# Altium PCB OLD_IDEA.PcbDoc
Units mil, origin at the board's own origin, x right, y up, seen from the top; angles counter-clockwise.
Board outline 6000 x 4000 mil, 2 copper layers (Top Layer, Bottom Layer); 67 components, 54 nets, 303 pads, 0 vias.
Unrouted connection lines stored in the file: 210.
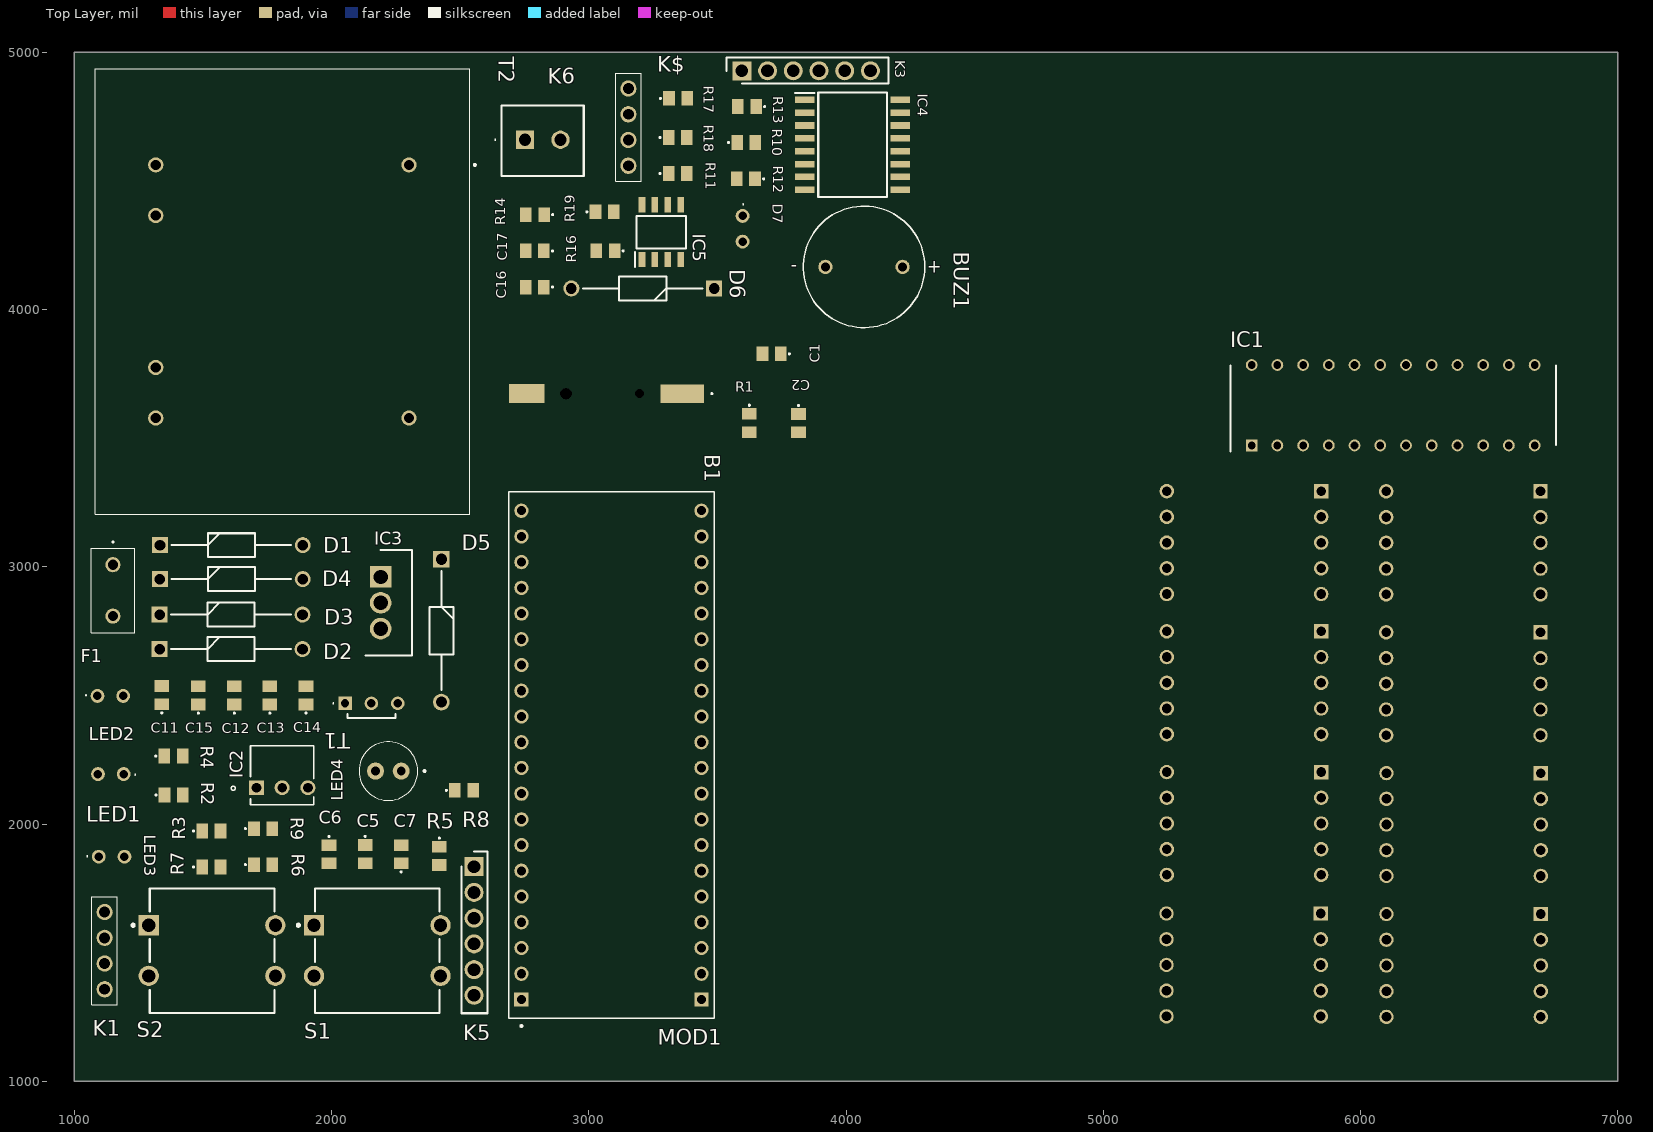
[diagram p0: Top Layer view]
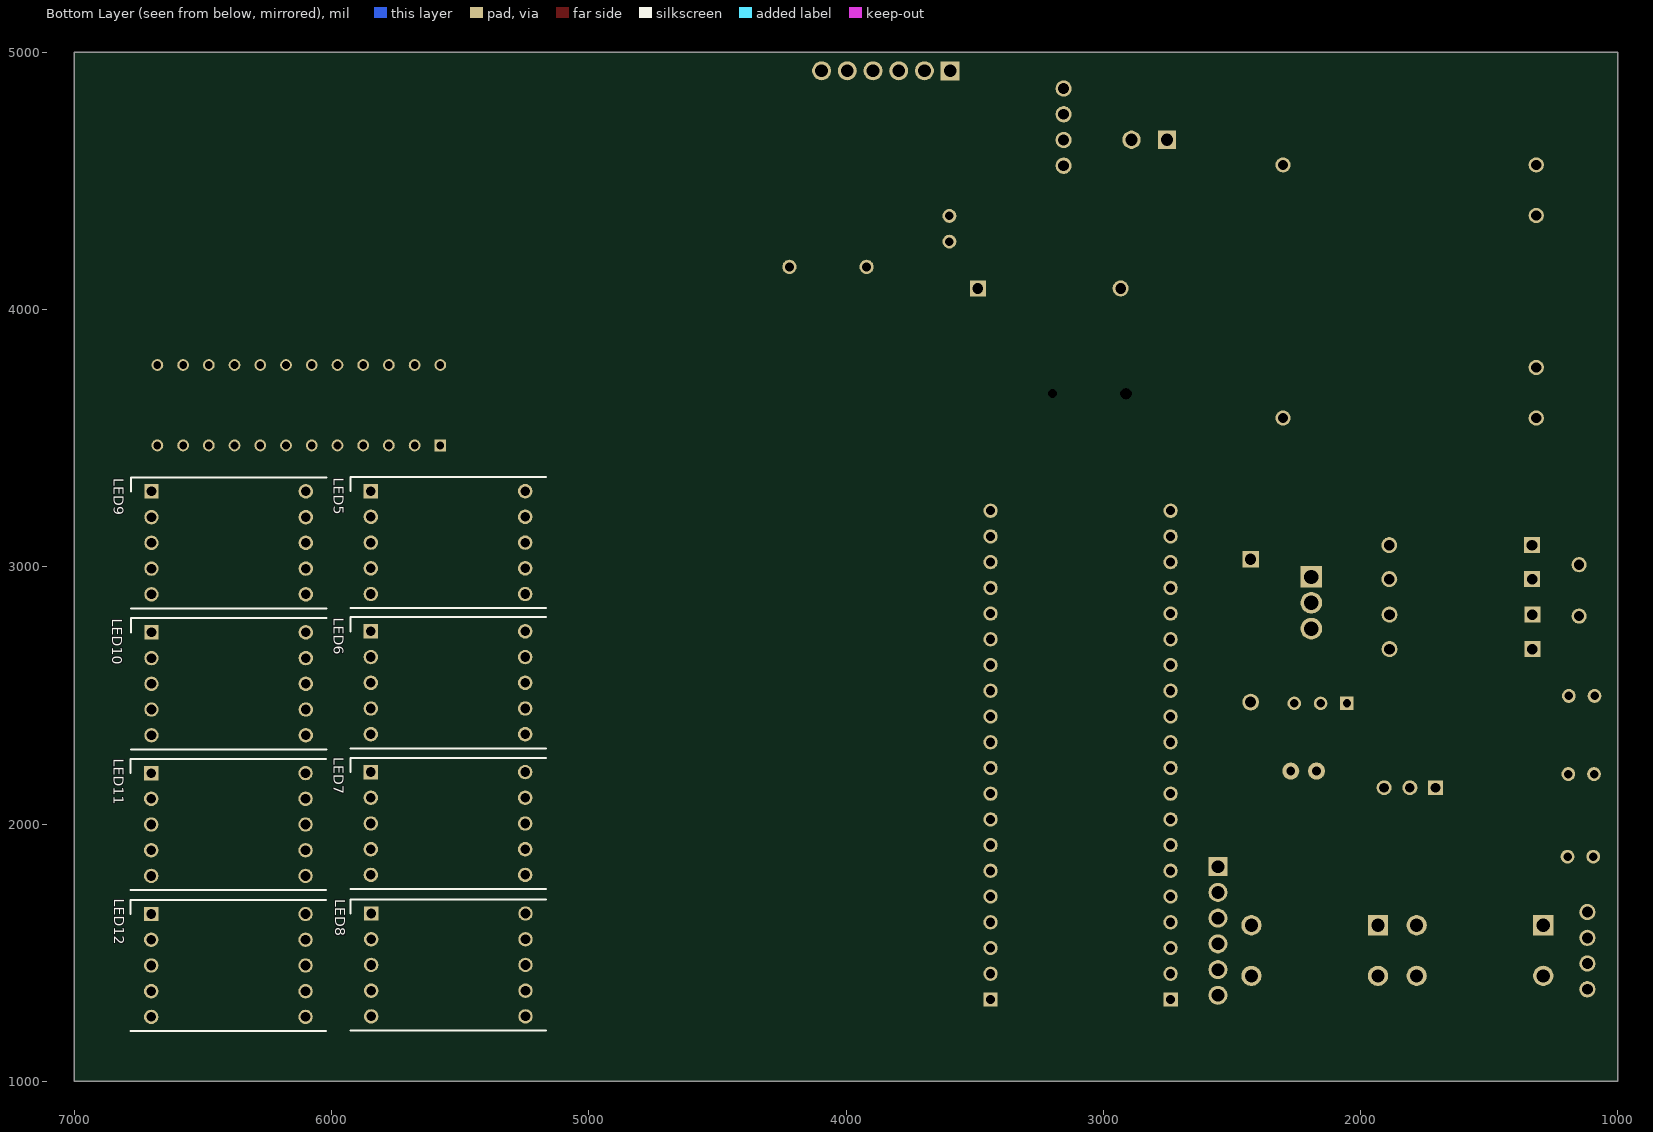
[diagram p1: Bottom Layer view, seen from below]

## Layer stack, top to bottom
Top Solder: solder mask 0.4, Solder Resist, Dk 3.5
Top Layer: signal copper 1.4
Dielectric 1: dielectric 12.6, FR-4, Dk 4.8
Bottom Layer: signal copper 1.4
Bottom Solder: solder mask 0.4, Solder Resist, Dk 3.5

## Board outline
1000,1000 7000,1000 7000,5000 1000,5000

## Design rules (kind name [scope] priority, off if disabled: settings)
Clearance [All] p1: gap=10 ignorepadtopadclearanceinfootprint=FALSE
PolygonConnect [All] p1: connectstyle=Relief reliefconductorwidth=10 reliefentries=4 polygonreliefangle="90 Angle" airgapwidth=10
RoutingVias [All] p1: holewidth=28 width=50 viastyle="Through Hole" minholewidth=28 minwidth=50 maxholewidth=28 maxwidth=50
SolderMaskExpansion [All] p1: expansion=4 istentingtop=FALSE
Width [All] p1: maxlimit=50 minlimit=10 preferedwidth=25 minimp=50.000000 maximp=50.000000 favimp=50.000000
30 further rules are at their usual default settings.

## Classes and differential pairs
component class RTC_unit: B1 C16 C17 D6 D7 IC4 IC5 K3 K$ R10 R11 R12 R13 R14 R16 R17 R18 R19
component class Processing_Unit: BUZ1 C5 C6 C7 IC2 K1 K5 LED1 LED2 LED3 LED4 MOD1 R2 R3 R4 R5 R6 R7 R8 R9 S1 S2 T1
component class Power_Unit: C11 C12 C13 C14 C15 D1 D2 D3 D4 D5 F1 IC3 K6 T2
component class Display_Unit: C1 C2 IC1 LED5 LED6 LED7 LED8 LED9 LED10 LED11 LED12 R1

## Components (designator, comment, footprint, x,y, rotation, side; value= is the part's Value field where it differs from the comment)
B1 "CR1220" CR1220HSMD 3059,3673 r180 top
BUZ1 "CEM-1212S" CUI_CEM-1212S 4070,4165.85 r180 top
C1 "100uF | 16V" C0805 3711,3828 r180 top
C2 "100nF | 16V" C0805 3815,3558.43 r270 top
C5 "47uF | 16V" C0805 2131,1883 r270 top
C6 "100nF" C0805 1990,1882.57 r270 top
C7 "1uF | 16V" C0805 2270.93,1882.57 r90 top
C11 "470uF" C0805 1340,2501 r90 top
C12 "0.1uF" C0805 1622,2500 r90 top
C13 "0.1uF" C0805 1760,2500 r90 top
C14 "100nF" C0805 1901,2500 r90 top
C15 "220uF | 16v" C0805 1482,2500 r90 top
C16 "0.1uF" C0805 2790,4087.07 r180 top
C17 "1uF" C0805 2790,4228 r180 top
D1 "1N4001" DIOAD1405W86L465D235 1333,3084.06 r0 top
D2 "1N4001" DIOAD1405W86L465D235 1332,2680 r0 top
D3 "1N4001" DIOAD1405W86L465D235 1332,2814 r0 top
D4 "1N4001" DIOAD1405W86L465D235 1332.88,2952 r0 top
D5 "1N5817" 1n5817_footprint 2427,3029.12 r270 top
D6 "1N4148,133" DIOAD1405W86L465D235 3487.49,4082 r180 top
D7 "TLHO4200" TLHO4200 3598,4314 r270 top
F1 "MCMSF_1A_250V" MCMSF1A250V 1150,3008 r270 top
IC1 "MAX7219CNG" DIP794W56P254L3054H457Q24N 6127,3628 r90 top
IC2 "TSOP34338" TO_TSOP31236 1908,2239 r0 top
IC3 "L78M05CP" TO255P460X1020X2030-3P 2191,2960.39 r270 top
IC4 "DS3231SN#" SOIC127P1032X265-16N 4026,4640.43 r0 top
IC5 "AT24C32D-SSHM-B" SOIC127P600X175-8N 3282,4301.16 r90 top
K1 "2212S-04SG-85" 2212S04SG85 1118,1357.48 r90 top
K3 "2212S-06SG-85" RHDR6W74P0X254_1X6_1574X250X850P 3595,4928 r0 top
K5 "2212S-06SG-85" RHDR6W74P0X254_1X6_1574X250X850P 2554,1834 r270 top
K6 "OSTTE020104" OSTTE020104 2752.2,4660 r0 top
K$ "2212S-04SG-85" 2212S04SG85 3154,4559 r90 top
LED1 "TLHO4200" TLHO4200 1142,2194 r180 top
LED2 "TLHO4200" TLHO4200 1140,2498 r0 top
LED3 "TLHO4200" TLHO4200 1145,1873 r0 top
LED4 "TSAL6400" TSAL6400 2271,2205.84 r180 top
LED5 "SC56-11EWA" DIPS1524W75P254L1270H825Q10N 5847,3294 r180 bottom
LED6 "SC56-11EWA" DIPS1524W75P254L1270H825Q10N 5847,2749 r180 bottom
LED7 "SC56-11EWA" DIPS1524W75P254L1270H825Q10N 5847,2202 r180 bottom
LED8 "SC56-11EWA" DIPS1524W75P254L1270H825Q10N 5846,1652 r180 bottom
LED9 "SC56-11EWA" DIPS1524W75P254L1270H825Q10N 6700,3293 r180 bottom
LED10 "SC56-11EWA" DIPS1524W75P254L1270H825Q10N 6700,2745 r180 bottom
LED11 "SC56-11EWA" DIPS1524W75P254L1270H825Q10N 6701,2198 r180 bottom
LED12 "SC56-11EWA" DIPS1524W75P254L1270H825Q10N 6701,1650 r180 bottom
MOD1 "ESP32-PICO-KIT-V4.1" XCVR_ESP32-PICO-KIT-V4.1 3088,2268 r90 top
R1 "47K" C0805 3624,3559 r270 top
R2 "820R" C0805 1386,2112.86 r0 top
R3 "330R" C0805 1533,1972.93 r0 top
R4 "330R" C0805 1385.57,2264 r0 top
R5 "22R" C0805 2418.99,1876 r270 top
R6 "10K" C0805 1734,1842 r0 top
R7 "10K" C0805 1533,1833 r0 top
R8 "330R" C0805 2515,2131 r0 top
R9 "10K" C0805 1734,1982 r0 top
R10 "4.7k" C0805 3612,4649 r0 top
R11 "4.7k" C0805 3346,4529 r0 top
R12 "4.7k" C0805 3611,4508 r180 top
R13 "4.7k" C0805 3615,4789 r180 top
R14 "220R" C0805 2791,4369 r180 top
R16 "4.7k" C0805 3065,4228 r180 top
R17 "4.7k" C0805 3347.57,4821 r0 top
R18 "4.7k" C0805 3346,4669 r0 top
R19 "1K" C0805 3061.43,4380 r0 top
S1 "FSM103" FP-FSM103-MFG 2178,1508 r180 top
S2 "FSM103" FP-FSM103-MFG 1535.49,1508.03 r180 top
T1 "BC33716TA" BC33716TA 2052.64,2469 r0 top
T2 "44230" 44230 2301,4562.25 r270 top

## Footprints (in the part's own frame and the unit in brackets; to place one, negate y for a bottom-side part, rotate by r counter-clockwise, add the part's x,y. Pads: shape width x height; smd on the part's side, far side on the other; paste and mask are expansions set on the pad)
1n5817_footprint [mm]
  rect 1.65x1.65 hole 1.1: 1(0,0)
  round 1.65 hole 1.1: 2(14.1,0)
  silkscreen extent 1.18,-1.18 12.92,1.18, body extent -0.45,-1.34 14.55,1.34, height 2.7
2212S04SG85 [mm]
  round 1.605 hole 1.07: 1(0,0) 2(2.54,0) 3(5.08,0) 4(7.62,0)
  silkscreen extent -1.52,-1.25 9.14,1.25, body extent -1.52,-1.25 9.14,1.25, height 8.8
44230 [mm]
  round 1.5 hole 1: 1(0,0) 5(25,0) 6(25,-25) 7(20,-25) 9(5,-25) 10(0,-25)
  silkscreen extent -9.5,-31 34.5,6.6, body extent -9.5,-31 34.5,6, height 32.3
BC33716TA [mm]
  rect 1.333x1.333 hole 0.82: 1(0,0)
  round 1.333 hole 0.82: 2(2.6,0) 3(5.2,0)
  silkscreen extent -1.2,-1.43 4.98,0.05, body extent -0.31,-1.43 5.51,2.25, height 8.87
C0805 [mm]
  rect 1.15x1.45 smd: 1(-0.9,0) 2(0.9,0)
  silkscreen extent -1.8,-0.05 -1.7,0.05, body extent -1.1,-0.73 1.1,0.72, height 1.4
CR1220HSMD [mm]
  rect 4.32x1.82 smd: 1(-7.73,0)
  rect 3.52x1.87 smd: 2(7.63,0)
  round 0.45 hole 0.9 unplated: MH1(-3.5,0)
  round 0.58 hole 1.16 unplated: MH2(3.75,0)
  silkscreen extent -10.7,-0.05 -10.6,0.05, body extent -9.6,-7.37 9.2,7.38, height 4.21
CUI_CEM-1212S [mm]
  round 1.408 hole 0.9: M(3.81,0) P(-3.81,0)
  silkscreen extent -6,-6 6,6
DIOAD1405W86L465D235 [mm]
  rect 1.575x1.575 hole 1.05: 1(0,0)
  round 1.575 hole 1.05: 2(14.1,0)
  silkscreen extent 1.14,-1.17 12.96,1.18, body extent -0.43,-1.34 14.48,1.34, height 2.7
DIP794W56P254L3054H457Q24N [mm]
  rect 1.16x1.16 hole 0.76: 1(-3.97,13.97)
  round 1.16 hole 0.76: 2(-3.97,11.43) 3(-3.97,8.89) 4(-3.97,6.35) 5(-3.97,3.81) 6(-3.97,1.27) 7(-3.97,-1.27) 8(-3.97,-3.81) 9(-3.97,-6.35) 10(-3.97,-8.89) 11(-3.97,-11.43) 12(-3.97,-13.97) 13(3.97,-13.97) 14(3.97,-11.43) 15(3.97,-8.89) 16(3.97,-6.35) 17(3.97,-3.81) 18(3.97,-1.27) 19(3.97,1.27) 20(3.97,3.81) 21(3.97,6.35) 22(3.97,8.89) 23(3.97,11.43) 24(3.97,13.97)
  silkscreen extent -4.55,-16.06 3.93,16.06, body extent -4.11,-15.27 4.11,15.27, height 4.57
DIPS1524W75P254L1270H825Q10N [mm]
  rect 1.425x1.425 hole 0.95: 1(0,0)
  round 1.425 hole 0.95: 2(0,-2.54) 3(0,-5.08) 4(0,-7.62) 5(0,-10.16) 6(15.24,-10.16) 7(15.24,-7.62) 8(15.24,-5.08) 9(15.24,-2.54) 10(15.24,0)
  silkscreen extent -2.03,-11.56 17.27,1.4
FP-FSM103-MFG [mm]
  rect 2x2 hole 1.3 paste-2539.97 mask+0: 1(6.25,-2.5)
  round 2 hole 1.3 paste-2539.97 mask+0: 2(-6.25,-2.5) 3(6.25,2.5) 4(-6.25,2.5)
  silkscreen extent -6.15,-6.15 7.92,6.15, body extent -7.35,-6.25 7.35,6.25, height 0.25
MCMSF1A250V [mm]
  round 1.5 hole 1: 1(0,0) 2(5.08,0)
  silkscreen extent -2.3,-2.15 6.71,2.15, body extent -1.64,-2.15 6.72,2.15, height 7.8
OSTTE020104 [mm]
  rect 1.8x1.8 hole 1.2: 1(0,0)
  round 1.8 hole 1.2: 2(3.5,0)
  silkscreen extent -3,-3.6 5.8,3.4, body extent -2.3,-3.6 5.8,3.4, height 8.8
RHDR6W74P0X254_1X6_1574X250X850P [mm]
  rect 1.875x1.875 hole 1.25: 1(0,0)
  round 1.875 hole 1.25: 2(2.54,0) 3(5.08,0) 4(7.62,0) 5(10.16,0) 6(12.7,0)
  silkscreen extent -1.52,-1.25 14.47,1.33, body extent -1.52,-1.25 14.22,1.25, height 8.5
SOIC127P600X175-8N [mm]
  rect 1.5x0.65 smd: 1(-2.7,1.905) 2(-2.7,0.635) 3(-2.7,-0.635) 4(-2.7,-1.905) 5(2.7,-1.905) 6(2.7,-0.635) 7(2.7,0.635) 8(2.7,1.905)
  silkscreen extent -3.45,-2.45 1.6,2.58, body extent -3,-2.45 3,2.45, height 1.75
SOIC127P1032X265-16N [mm]
  rect 1.925x0.65 smd: 1(-4.712,4.445) 2(-4.712,3.175) 3(-4.712,1.905) 4(-4.712,0.635) 5(-4.712,-0.635) 6(-4.712,-1.905) 7(-4.712,-3.175) 8(-4.712,-4.445) 9(4.712,-4.445) 10(4.712,-3.175) 11(4.712,-1.905) 12(4.712,-0.635) 13(4.712,0.635) 14(4.712,1.905) 15(4.712,3.175) 16(4.712,4.445)
  silkscreen extent -5.68,-5.15 3.4,5.15, body extent -5.16,-5.15 5.16,5.15, height 2.65
TLHO4200 [mm]
  round 1.365 hole 0.84: 1(-1.27,0) 2(1.27,0)
  silkscreen extent -2.45,0 -2.35,0.1, body extent -1.6,-1.59 1.6,1.59, height 6.2
TO255P460X1020X2030-3P [mm]
  rect 2.13x2.13 hole 1.42: 1(0,0)
  round 2.13 hole 1.42: 2(2.55,0) 3(5.1,0)
  silkscreen extent -2.65,-1.5 7.75,3.1, body extent -2.55,-1.5 7.65,3.1, height 19.4
TO_TSOP31236 [mil]
  rect 58x58 / inner round 60 / far side rect 58x58 hole 38 paste-99999 mask-29: 1(-200,-98)
  round 58 / inner round 60 / far side round 58 hole 38 paste-99999 mask-29: 2(-100,-98) 3(0,-98)
  silkscreen extent -298,-164 23,66, body extent -218,-159 18,61, height 325
TSAL6400 [mm]
  round 1.68 hole 0.85: 1(0,0) 2(2.54,0)
  silkscreen extent -2.4,-2.9 4.17,2.9, body extent -1.63,-2.89 4.17,2.89, height 9.8
XCVR_ESP32-PICO-KIT-V4.1 [mm]
  rect 1.408x1.408 hole 0.9: J2_1(-24.13,8.89) J3_1(-24.13,-8.89)
  round 1.408 hole 0.9: J2_2(-21.59,8.89) J2_3(-19.05,8.89) J2_4(-16.51,8.89) J2_5(-13.97,8.89) J2_6(-11.43,8.89) J2_7(-8.89,8.89) J2_8(-6.35,8.89) J2_9(-3.81,8.89) J2_10(-1.27,8.89) J2_11(1.27,8.89) J2_12(3.81,8.89) J2_13(6.35,8.89) J2_14(8.89,8.89) J2_15(11.43,8.89) J2_16(13.97,8.89) J2_17(16.51,8.89) J2_18(19.05,8.89) J2_19(21.59,8.89) J2_20(24.13,8.89) J3_2(-21.59,-8.89) J3_3(-19.05,-8.89) J3_4(-16.51,-8.89) J3_5(-13.97,-8.89) J3_6(-11.43,-8.89) J3_7(-8.89,-8.89) J3_8(-6.35,-8.89) J3_9(-3.81,-8.89) J3_10(-1.27,-8.89) J3_11(1.27,-8.89) J3_12(3.81,-8.89) J3_13(6.35,-8.89) J3_14(8.89,-8.89) J3_15(11.43,-8.89) J3_16(13.97,-8.89) J3_17(16.51,-8.89) J3_18(19.05,-8.89) J3_19(21.59,-8.89) J3_20(24.13,-8.89)
  silkscreen extent -26.85,-10.15 26,10.15

## Part data
B1: library part CR1220-H-SMD, "Integrated Circuit", Manufacturer_Name=ROBOTIS, Datasheet Link=https://www.robotics.org.za/CR1220-H-SMD, Height=4.1mm, Manufacturer_Part_Number=CR1220-H-SMD
BUZ1: "12 mm, 12 V, 85 dB, Through Hole, Sealed, Magnetic Audio Transducer Buzzer", Package="TO-220 CUI Inc.", Arrow_Electronics-Purchase-URL=https://snapeda.com/shop?store=Arrow+Electronics&id=601563, Availability=Good, CUI_purchase_URL=https://www.cuidevices.com/product/audio/buzzers/audio-transducers/cem-1212s?utm_source=snapeda.com&utm_medium=referral&utm_campaign=snapedaBOM, DigiKey-Purchase-URL=https://snapeda.com/shop?store=DigiKey&id=601563, MF="CUI Devices", Mouser-Purchase-URL=https://snapeda.com/shop?store=Mouser&id=601563, MP=CEM-1212S, Price=None, SnapEDA_Link=https://www.snapeda.com/parts/CEM-1212S/CUI%20Devices/view-part/601563/?ref=snap
C1 C5 C7 C11 C15: library part elektrolytischeC0805, "0805 ceramic capacitor", Arrow Part Number=GRM188R71H103KA01D, Manufacturer_Name="Murata Electronics", Mouser Part Number=81-GRM39X103K50D, Arrow Price/Stock=https://www.arrow.com/en/products/grm188r71h103ka01d/murata-manufacturing?region=europe, Datasheet Link=https://datasheet.datasheetarchive.com/originals/distributors/Datasheets_SAMA/ec4f1577dddcc7a13ddad897a28002d3.pdf, Height=0.9mm, Manufacturer_Part_Number=GRM188R71H103KA01D, Mouser Price/Stock=https://www.mouser.co.uk/ProductDetail/Murata-Electronics/GRM188R71H103KA01D?qs=WWniysbtxULrL2ljbViAbw%3D%3D
C2 C6 C12 C13 C14 C16 C17: library part KeramischeC0805_1, "0805 ceramic capacitor", Arrow Part Number=GRM188R71H103KA01D, Manufacturer_Name="Murata Electronics", Mouser Part Number=81-GRM39X103K50D, Arrow Price/Stock=https://www.arrow.com/en/products/grm188r71h103ka01d/murata-manufacturing?region=europe, Datasheet Link=https://datasheet.datasheetarchive.com/originals/distributors/Datasheets_SAMA/ec4f1577dddcc7a13ddad897a28002d3.pdf, Height=0.9mm, Manufacturer_Part_Number=GRM188R71H103KA01D, Mouser Price/Stock=https://www.mouser.co.uk/ProductDetail/Murata-Electronics/GRM188R71H103KA01D?qs=WWniysbtxULrL2ljbViAbw%3D%3D
D1 D2 D3 D4: "Diode", Manufacturer_Name=Vishay, Datasheet Link=https://www.vishay.com/docs/88503/1n4001.pdf, Manufacturer_Part_Number=1N4001
D5: "Schottky Diode", Manufacturer_Name=Rectron, Arrow Part Number=1N5817, Arrow Price/Stock=https://www.arrow.com/en/products/1n5817/rectron?region=nac, Datasheet Link=https://www.arrow.com/en/products/1n5817/rectron, Manufacturer_Part_Number=1N5817
D6: "Diode", Manufacturer_Name=Nexperia, Mouser Part Number=771-1N4148,133, Arrow Part Number=1N4148,133, Arrow Price/Stock=https://www.arrow.com/en/products/1n4148133/nxp-semiconductors, Datasheet Link=https://assets.nexperia.com/documents/data-sheet/1N4148_1N4448.pdf, Manufacturer_Part_Number=1N4148,133, Mouser Price/Stock=https://www.mouser.co.uk/ProductDetail/Nexperia/1N4148133?qs=elmhQ6eFu7hy8ApvpFxPZg%3D%3D
D7 LED1 LED2 LED3: "LED", Manufacturer_Name=Vishay, Datasheet Link=https://www.mouser.com/datasheet/2/427/tlhg420-1767350.pdf, Height=6.1mm, Manufacturer_Part_Number=TLHO4200
F1: "Fuse", Manufacturer_Name="Multicomp Pro", Manufacturer_Part_Number="MCMSF 1A 250V", Datasheet Link=https://componentsearchengine.com/Datasheets/2/MCMSF%201A%20250V.pdf, Height=7.7mm
IC1: "Integrated Circuit", Manufacturer_Name="Analog Devices", Mouser Part Number=700-MAX7219CNG-NR, Datasheet Link=https://datasheets.maximintegrated.com/en/ds/MAX7219-MAX7221.pdf, Height=4.572mm, Manufacturer_Part_Number=MAX7219CNG, Mouser Price/Stock=https://www.mouser.co.uk/ProductDetail/Maxim-Integrated/MAX7219CNG?qs=p6VZ%252BklCkRToQRlZGegBBA%3D%3D
IC2: "No Description Available", Mfr_Name=Vishay, RefDes=RefDes, Type=Type
IC3: "Integrated Circuit", Manufacturer_Name=STMicroelectronics, Mouser Part Number=511-L78M05CP, Arrow Part Number=L78M05CP, Arrow Price/Stock=https://www.arrow.com/en/products/l78m05cp/stmicroelectronics?region=europe, Datasheet Link=http://www.st.com/web/en/resource/technical/document/datasheet/CD00000447.pdf, Height=4.6mm, Manufacturer_Part_Number=L78M05CP, Mouser Price/Stock=https://www.mouser.co.uk/ProductDetail/STMicroelectronics/L78M05CP?qs=W%252B4obUA0F3anQylSbAkrfw%3D%3D
IC4: "Integrated Circuit", Manufacturer_Name="Analog Devices", Mouser Part Number=700-DS3231SN#, Arrow Part Number=DS3231SN#, Arrow Price/Stock=https://www.arrow.com/en/products/ds3231sn/analog-devices?region=europe, Datasheet Link=https://datasheets.maximintegrated.com/en/ds/DS3231.pdf, Height=2.65mm, Manufacturer_Part_Number=DS3231SN#, Mouser Price/Stock=https://www.mouser.co.uk/ProductDetail/Analog-Devices-Maxim-Integrated/DS3231SN?qs=1eQvB6Dk1vhUlr8%2FOrV0Fw%3D%3D
IC5: "Integrated Circuit", Manufacturer_Name=Microchip, Mouser Part Number=556-AT24C32D-SSHM-B, Arrow Part Number=AT24C32D-SSHM-B, Arrow Price/Stock=https://www.arrow.com/en/products/at24c32d-sshm-b/microchip-technology?region=europe, Datasheet Link=http://www.atmel.com/images/atmel-8866-seeprom-at24c32d-datasheet.pdf, Height=1.75mm, Manufacturer_Part_Number=AT24C32D-SSHM-B, Mouser Price/Stock=https://www.mouser.co.uk/ProductDetail/Microchip-Technology/AT24C32D-SSHM-B?qs=ZZMt4ii29sN2mTRLl%2FnVJA%3D%3D
K1 K3 K5 K$: "Connector", Manufacturer_Name="Multicomp Pro"
  K1 K$: Datasheet Link=https://componentsearchengine.com/Datasheets/5/2212S-04SG-85.pdf, Height=8.7mm, Manufacturer_Part_Number=2212S-04SG-85
  K3 K5: Datasheet Link=http://www.farnell.com/datasheets/2290158.pdf?_ga=2.3406896.1671530057.1506933545-2008293027.1497013038, Height=8.5mm, Manufacturer_Part_Number=2212S-06SG-85
K6: "Connector", Manufacturer_Name="On Shore Technology Inc.", Datasheet Link=https://datasheet.datasheetarchive.com/originals/dk/DKDS-18/336634.pdf, Height=8.7mm, Manufacturer_Part_Number=OSTTE020104
LED4: "LED", Manufacturer_Name=Vishay, Mouser Part Number=782-TSAL6400, Arrow Part Number=TSAL6400, Arrow Price/Stock=https://www.arrow.com/en/products/tsal6400/vishay?region=nac, Datasheet Link=https://componentsearchengine.com/Datasheets/1/TSAL6400.pdf, Height=9.7mm, Manufacturer_Part_Number=TSAL6400, Mouser Price/Stock=https://www.mouser.co.uk/ProductDetail/Vishay-Semiconductors/TSAL6400?qs=oSAwVt7aKTHCOCv1ythi7g%3D%3D
LED5 LED6 LED7 LED8 LED9 LED10 LED11 LED12: "Display", Manufacturer_Name=Kingbright, Mouser Part Number=604-SC56-11EWA, Datasheet Link=https://www.kingbrightusa.com/images/catalog/SPEC/SC56-11EWA.pdf, Height=8.25mm, Manufacturer_Part_Number=SC56-11EWA, Mouser Price/Stock=https://www.mouser.co.uk/ProductDetail/Kingbright/SC56-11EWA?qs=y3UkhjaxUTZA9319us7IBQ%3D%3D
MOD1: "WiFi Development Tools (802.11)", Package=None, Availability=Bad, Check_prices=https://www.snapeda.com/parts/ESP32-PICO-KIT-V4.1/Espressif%20Systems/view-part/3211113/?ref=eda, MF="Espressif Systems", MP=ESP32-PICO-KIT-V4.1, Price=None, SnapEDA_Link=https://www.snapeda.com/parts/ESP32-PICO-KIT-V4.1/Espressif%20Systems/view-part/3211113/?ref=snap
R1 R2 R3 R4 R5 R6 R7 R8 R9 R10 R11 R12 R13 R14 R16 R17 R18 R19: library part Resistor0805, "Resistor0805", Arrow Part Number=CRCW08050000Z0EAHP, Manufacturer_Name=Vishay, Mouser Part Number=71-CRCW08050000Z0EAH, Arrow Price/Stock=https://www.arrow.com/en/products/crcw08050000z0eahp/vishay?region=nac, Datasheet Link=https://componentsearchengine.com/Datasheets/1/CRCW08051R00FKEAHP.pdf, Height=0.6mm, Manufacturer_Part_Number=CRCW08050000Z0EAHP, Mouser Price/Stock=https://www.mouser.co.uk/ProductDetail/Vishay-Dale/CRCW08050000Z0EAHP?qs=pTGEtN%252BMLlDLrJUqQmN2jA%3D%3D
S1 S2: library part CMP-03407-000037-1, "SWITCH TACTILE SPST-NO 0.05A 24V", Actuator Color=Black, Contact Current Rating=50mA, Contact Resistance=100mR, Max Operating Temperature=85°C, Max Voltage Rating (DC)=12V, Min Operating Temperature=-35°C, Operating Force=1.57N, Package Quantity=400, Voltage Rating=24V, Actuator Length=3.4mm, Actuator Material=Polyester, Contact Material=Brass, Contact Plating=Silver, Current Rating=50mA, Depth=14.1mm, Electrical Life=100000Cycles, Illumination Type=Non-Illuminated, Length=12mm, Max Current Rating=50mA, Mechanical Life=100000Cycles, Mount="Through Hole", Orientation=Straight, Packaging="Loose Piece", Radiation Hardening=No, RoHS Compliant=Yes, Series="FSM100 ~ 104", Switch Function=Off-Mom, Switch Travel=0.3mm, Termination="PC Pins", Throw Configuration=SPST, Type=Switch, Voltage Rating (DC)=12V, Width=12mm
T1: "Transistor BJT NPN", Manufacturer_Name=onsemi, Mouser Part Number=512-BC33716TA, Arrow Part Number=BC33716TA, Arrow Price/Stock=https://www.arrow.com/en/products/bc33716ta/on-semiconductor?region=nac, Datasheet Link=https://rocelec.widen.net/view/pdf/hcqqbqwrik/ONSM-S-A0003590550-1.pdf?t.download=true&u=5oefqw, Height=8.77mm, Manufacturer_Part_Number=BC33716TA, Mouser Price/Stock=https://www.mouser.co.uk/ProductDetail/onsemi-Fairchild/BC33716TA?qs=UMEuL5FsraA5fR076NzQDQ%3D%3D
T2: "Transformer", Manufacturer_Name=MYRRA, Arrow Part Number=44230, Arrow Price/Stock=https://www.arrow.com/en/products/44230/myrra?region=europe, Datasheet Link=https://componentsearchengine.com/Datasheets/2/44230.pdf, Height=32.8mm, Manufacturer_Part_Number=44230

## Nets (pads, with @x,y where several pads share a name; then routed paths per layer and width w, separated by ;. In a path a pad name is that pad's centre, name@x,y a point inside that pad or via, vN(x,y) a via of type N, cw(c..) or ccw(c..) an arc to the next point about the centre after c; other vN are vias at no path point)
+3V3: C5.1 C6.1 IC2.3 K5.3 MOD1.J2_20 R6.2 R7.2 R9.2
+5: C1.1 C2.1 C14.1 C15.1 D5.1 IC1.19 K5.1 MOD1.J3_20 R1.2 R5.1
+VRTC: C16.1 C17.1 IC4.2 IC5.8 K3.5 K$.3 R10.2 R11.2 R12.2 R13.2 R14.1 R16.2 R17.2 R18.2 R19.1
GND: B1.2 BUZ1.M C1.2 C2.2 C5.2 C6.2 C7.2 C11.2 C12.2 C13.2 C14.2 C15.2 C16.2 C17.2 D1.2 D2.2 D7.2 IC1.4 IC1.9 IC2.2 IC3.2 IC4.13 IC4.15 IC4.16 IC5.1 IC5.2 IC5.3 IC5.4 IC5.5 IC5.6 IC5.7 K1.2 K1.4 K3.3 K3.4 K3.6 K5.2 K$.1 K$.2 K$.4 LED1.2 LED2.2 LED3.2 MOD1.J2_19 MOD1.J3_19 R10.1 R11.1 R16.1 R17.1 R18.1 S1.3 S2.3 T1.3
NetB1_1: B1.1 D6.1 IC4.14
NetBUZ1_P: BUZ1.P MOD1.J3_10
NetC7_1: C7.1 MOD1.J2_18
NetC11_1: C11.1 C12.1 D3.1 D4.1 IC3.1
NetC13_1: C13.1 D5.2 IC3.3
NetD1_1: D1.1 D4.2 F1.2
NetD2_1: D2.1 D3.2 T2.9
NetD6_2: D6.2 R14.2
NetD7_1: D7.1 R19.2
NetF1_1: F1.1 T2.7
NetIC1_1: IC1.1 MOD1.J2_7
NetIC1_2: IC1.2 LED12.3 LED12.8
NetIC1_3: IC1.3 LED8.3 LED8.8
NetIC1_5: IC1.5 LED6.3 LED6.8
NetIC1_6: IC1.6 LED10.3 LED10.8
NetIC1_7: IC1.7 LED9.3 LED9.8
NetIC1_8: IC1.8 LED5.3 LED5.8
NetIC1_10: IC1.10 LED7.3 LED7.8
NetIC1_11: IC1.11 LED11.3 LED11.8
NetIC1_12: IC1.12 MOD1.J2_9
NetIC1_13: IC1.13 MOD1.J2_8
NetIC1_14: IC1.14 LED5.7 LED6.7 LED7.7 LED8.7 LED9.7 LED10.7 LED11.7 LED12.7
NetIC1_15: IC1.15 LED5.9 LED6.9 LED7.9 LED8.9 LED9.9 LED10.9 LED11.9 LED12.9
NetIC1_16: IC1.16 LED5.6 LED6.6 LED7.6 LED8.6 LED9.6 LED10.6 LED11.6 LED12.6
NetIC1_17: IC1.17 LED5.10 LED6.10 LED7.10 LED8.10 LED9.10 LED10.10 LED11.10 LED12.10
NetIC1_18: IC1.18 R1.1
NetIC1_20: IC1.20 LED5.4 LED6.4 LED7.4 LED8.4 LED9.4 LED10.4 LED11.4 LED12.4
NetIC1_21: IC1.21 LED5.1 LED6.1 LED7.1 LED8.1 LED9.1 LED10.1 LED11.1 LED12.1
NetIC1_22: IC1.22 LED5.5 LED6.5 LED7.5 LED8.5 LED9.5 LED10.5 LED11.5 LED12.5
NetIC1_23: IC1.23 LED5.2 LED6.2 LED7.2 LED8.2 LED9.2 LED10.2 LED11.2 LED12.2
NetIC2_1: IC2.1 MOD1.J3_14 R9.1
NetIC4_1: IC4.1 K3.1 R12.1
NetIC4_3: IC4.3 K3.2 R13.1
NetK1_1: K1.1 MOD1.J2_15 R6.1 S1.1
NetK1_3: K1.3 MOD1.J2_14 R7.1 S2.1
NetK5_4: K5.4 MOD1.J3_7
NetK5_5: K5.5 MOD1.J3_8
NetK5_6: K5.6 MOD1.J3_16
NetK6_1: K6.1 T2.1
NetK6_2: K6.2 T2.5
NetLED1_1: LED1.1 R2.1
NetLED2_1: LED2.1 R3.1
NetLED3_1: LED3.1 R4.1
NetLED4_1: LED4.1 R5.2
NetLED4_2: LED4.2 T1.1
NetMOD1_J2_5: MOD1.J2_5 R8.2
NetMOD1_J3_6: MOD1.J3_6 R2.2
NetMOD1_J3_11: MOD1.J3_11 R3.2
NetMOD1_J3_15: MOD1.J3_15 R4.2
NetR8_1: R8.1 T1.2
pads on no net: B1.MH1 B1.MH2 IC1.24 IC4.4 IC4.5 IC4.6 IC4.7 IC4.8 IC4.9 IC4.10 IC4.11 IC4.12 MOD1.J2_1 MOD1.J2_2 MOD1.J2_3 MOD1.J2_4 MOD1.J2_6 MOD1.J2_10 MOD1.J2_11 MOD1.J2_12 MOD1.J2_13 MOD1.J2_16 MOD1.J2_17 MOD1.J3_1 MOD1.J3_2 MOD1.J3_3 MOD1.J3_4 MOD1.J3_5 MOD1.J3_9 MOD1.J3_12 MOD1.J3_13 MOD1.J3_17 MOD1.J3_18 S1.2 S1.4 S2.2 S2.4 T2.6 T2.10

## Text inside footprints (layer, text, board x,y; h text height)
BUZ1: Top Overlay "+" at 4371.66,4188.36 h50.15 r180; Top Overlay "-" at 3810.43,4188.34 h50.09 r180